# EAGLE board bt - Copy (2) (EAGLE 6.4)
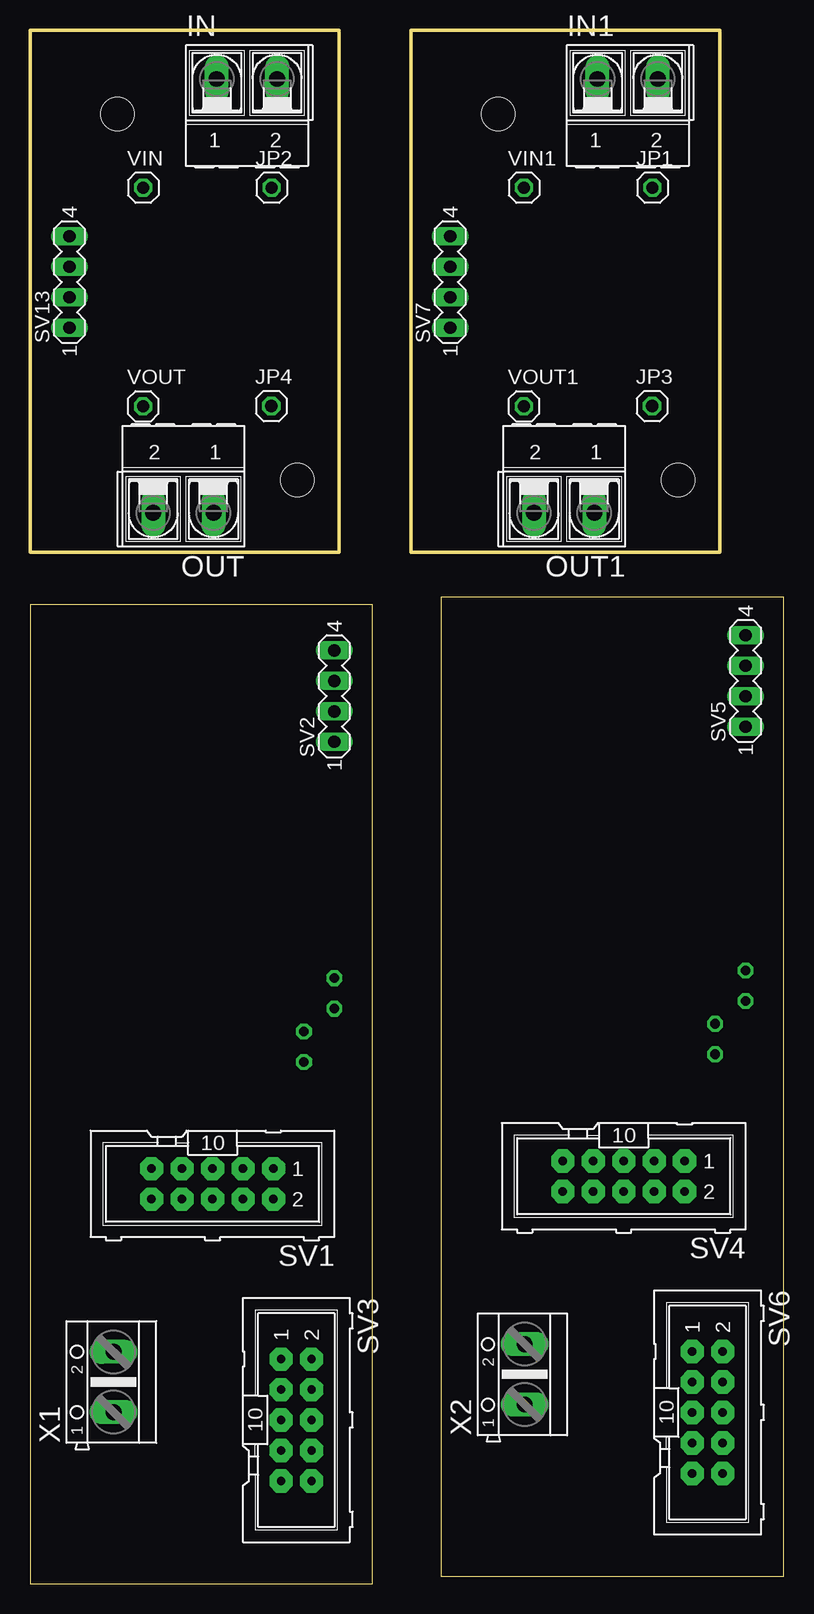
[diagram p0: board, top side]
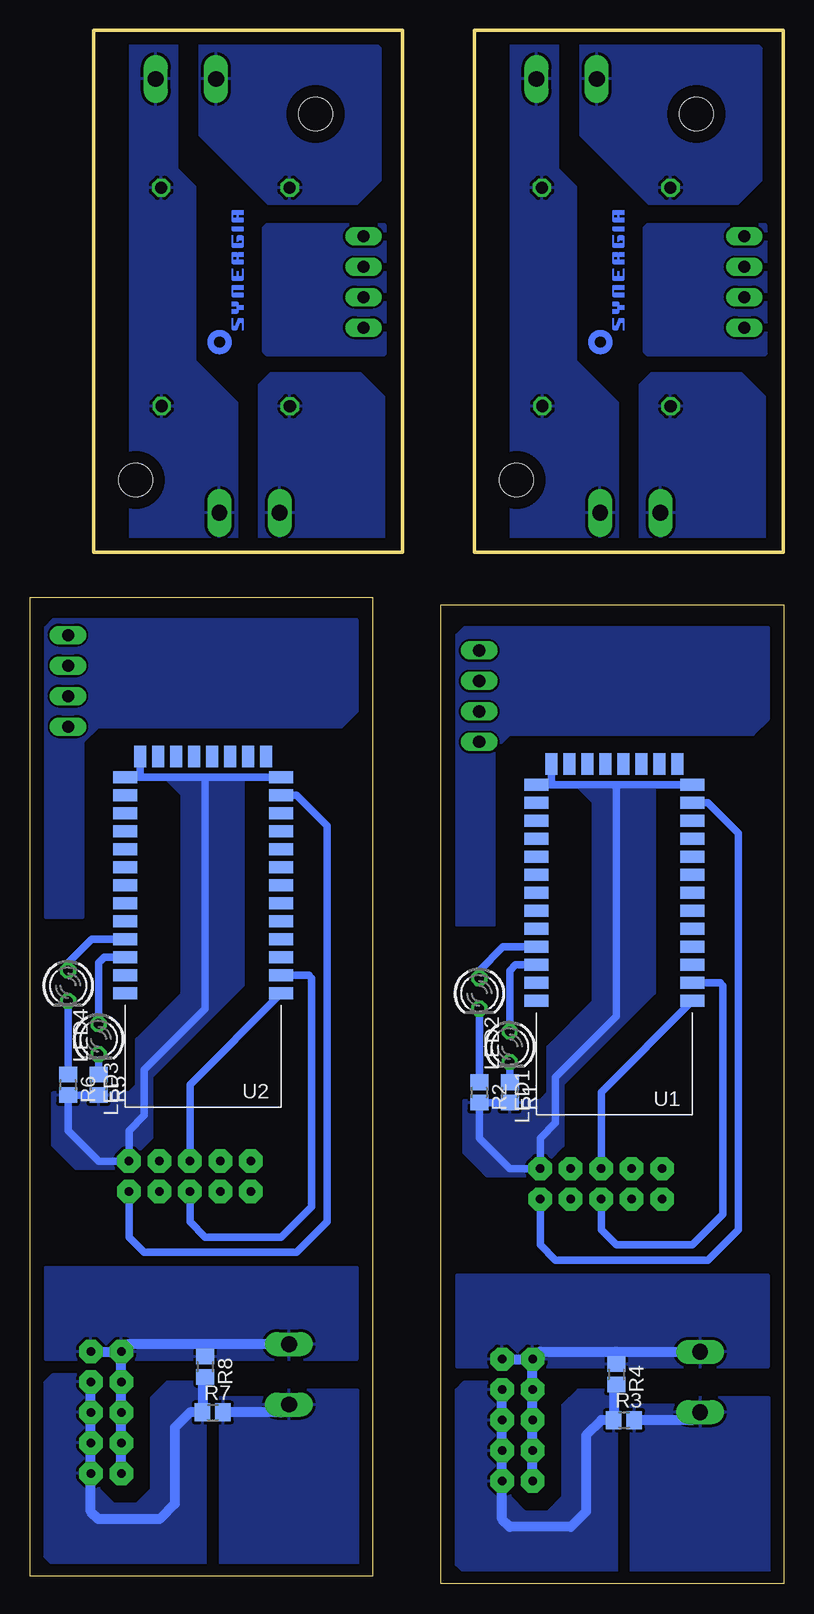
[diagram p1: board, bottom side, seen from below]

Size 62.84 x 129.48 mm. Coordinates in mm from the lower left corner, seen from the top.
Outline: 28.55,81.59 0,81.59 0,0 28.55,0 28.55,81.59
Outline: 62.84,82.22 34.29,82.22 34.29,0.64 62.84,0.64 62.84,82.22
Outline: 0.04,85.98 25.79,85.98 25.79,129.48 0.04,129.48 0.04,85.98
Outline: 31.79,85.98 57.54,85.98 57.54,129.48 31.79,129.48 31.79,85.98
Copper layers (1*16): Top 0.035mm / dielectric 1.5mm / Bottom 0.035mm
Design rules "default": minimum track width 10mil, minimum drill 24mil, track to track 8mil, track to pad 8mil, pad to pad 8mil, via to via 8mil, smd to smd 8mil, copper to edge 40mil, drill to drill 8mil, minimum pad ring 10mil, minimum via ring 8mil, stop-mask expansion 4mil, vias tented up to drill 0mil, thermal gap 10mil
Holes 2.8 mm at 22.29,91.98 7.29,122.48 54.04,91.98 39.04,122.48

## Footprints (pad centres in the part's own frame; a part is rotated, then mirrored left to right if it is on the bottom)
AK500/2-H = drill 1.321 long: 1 -2.515,0; 2 2.515,0
1X01 = drill 1.016 octagon: 1 0,0
LED3MM = drill 0.813 octagon: A -1.27,0; K 1.27,0
R0805 = smd 1.3 x 1.5: 1 -0.85,0; 2 0.85,0
ML10 = drill 0.7 pad 1.93 octagon: 1 -5.08,-1.27; 2 -5.08,1.27; 3 -2.54,-1.27; 4 -2.54,1.27; 5 0,-1.27; 6 0,1.27; 7 2.54,-1.27; 8 2.54,1.27; 9 5.08,-1.27; 10 5.08,1.27
MA04-1 = drill 1.016 long: 1 -3.81,0; 2 -1.27,0; 3 1.27,0; 4 3.81,0
BLUETOOTH_SMD = smd 2 x 1: 1 0,0; 2 0,-1.5; 3 0,-3; 4 0,-4.5; 5 0,-6; 6 0,-7.5; 7 0,-9; 8 0,-10.5; 9 0,-12; 10 0,-13.5; 11 0,-15; 12 0,-16.5; 13 0,-18; 22 13,-18; 23 13,-16.5; 24 13,-15; 25 13,-13.5; 26 13,-12; 27 13,-10.5; 28 13,-9; 29 13,-7.5; 30 13,-6; 31 13,-4.5; 32 13,-3; 33 13,-1.5; 34 13,0 | smd 1 x 1.8: 14 1.25,-19.75; 15 2.75,-19.75; 16 4.25,-19.75; 17 5.75,-19.75; 18 7.25,-19.75; 19 8.75,-19.75; 20 10.25,-19.75; 21 11.75,-19.75
AK500/2 = drill 1.321 long: 1 -2.515,0; 2 2.515,0

## Placement (x,y rotation side)
IN  [AK500/2-H]  18.09,125.4 0 top
IN1  [AK500/2-H]  49.84,125.4 0 top
JP1  [1X01]  51.9,116.34 0 top
JP2  [1X01]  20.15,116.34 0 top
JP3  [1X01]  51.87,98.14 0 top
JP4  [1X01]  20.12,98.14 0 top
LED1  [LED3MM]  22.84,44.76 270 bottom
LED2  [LED3MM]  25.38,49.2 270 bottom
LED3  [LED3MM]  57.13,45.39 270 bottom
LED4  [LED3MM]  59.67,49.84 270 bottom
OUT  [AK500/2-H]  12.79,89.24 180 top
OUT1  [AK500/2-H]  44.54,89.24 180 top
R1  [R0805]  22.84,40.95 270 bottom
R2  [R0805]  25.38,40.95 270 bottom
R3  18k  [R0805]  13.32,13.64 0 bottom
R4  10k  [R0805]  13.95,17.45 270 bottom
R5  [R0805]  57.13,41.58 270 bottom
R6  [R0805]  59.67,41.58 270 bottom
R7  18k  [R0805]  47.6,14.28 0 bottom
R8  10k  [R0805]  48.24,18.09 270 bottom
SV1  [ML10]  15.22,33.33 180 top
SV2  [MA04-1]  25.38,73.97 90 top
SV3  [ML10]  22.21,13.64 270 top
SV4  [ML10]  49.51,33.96 180 top
SV5  [MA04-1]  59.67,75.23 90 top
SV6  [ML10]  56.49,14.28 270 top
SV7  [MA04-1]  35.04,108.48 90 top
SV13  [MA04-1]  3.29,108.48 90 top
U1  HC_05  [BLUETOOTH_SMD]  7.6,48.57 180 bottom
U2  HC_05  [BLUETOOTH_SMD]  41.89,49.2 180 bottom
U$1  [SYNERGIA_12MM]  13.29,102.48 90 bottom
U$2  [SYNERGIA_12MM]  45.04,102.48 90 bottom
VIN  [1X01]  9.44,116.34 0 top
VIN1  [1X01]  41.19,116.34 0 top
VOUT  [1X01]  9.43,98.12 0 top
VOUT1  [1X01]  41.18,98.12 0 top
X1  [AK500/2]  6.97,16.82 90 top
X2  [AK500/2]  41.25,17.45 90 top

## Library data of the parts
IN IN1 OUT OUT1 X1 X2 = con-ptr500; OC_FARNELL: unknown; OC_NEWARK: unknown
JP1-JP4 VIN VIN1 VOUT VOUT1 = pinhead
LED1-LED4 = led
R1-R8 = resistor
SV1 SV3 SV4 SV6 = con-harting-ml; OC_FARNELL: unknown; OC_NEWARK: unknown
SV2 SV5 SV7 SV13 = con-lstb; OC_FARNELL: unknown; OC_NEWARK: unknown
U1 U2 = SerialPortBluetooth
U$1 U$2 = synergia_logo

## Nets
+3V1: SV4.2 U2.12
+3V3: SV1.2 U1.12
GND: R1.2 R2.2 SV1.1 U1.13 U1.21 U1.22
GND1: R5.2 R6.2 SV4.1 U2.13 U2.21 U2.22
GND2: IN1.2 JP1.1 JP3.1 OUT1.1
GND4: IN.2 JP2.1 JP4.1 OUT.1
N$1: SV1.5 U1.1
N$2: SV1.6 U1.2
N$3: LED1.K R1.1
N$4: LED2.K R2.1
N$5: LED2.A U1.31
N$6: LED1.A U1.32
N$8: SV4.5 U2.1
N$9: R3.1 R4.2 SV3.4 SV3.6 SV3.8 SV3.10
N$10: SV4.6 U2.2
N$11: LED4.A U2.31
N$12: LED3.A U2.32
N$13: LED3.K R5.1
N$14: LED4.K R6.1
N$15: R7.1 R8.2 SV6.4 SV6.6 SV6.8 SV6.10
N$17: OUT1.2 VOUT1.1
N$18: IN1.1 VIN1.1
N$33: OUT.2 VOUT.1
N$34: IN.1 VIN.1
V+: R3.2 X1.1
V+1: R7.2 X2.1
V-: R4.1 SV3.1 SV3.2 SV3.3 SV3.5 SV3.7 SV3.9 X1.2
V-1: R8.1 SV6.1 SV6.2 SV6.3 SV6.5 SV6.7 SV6.9 X2.2

## Tracks (layer width: path | path; a pad name or v marks a point on that pad's centre or on a via)
+3V1
  Bottom 0.61: SV4.2 54.59,28.88 53.32,27.61 40.62,27.61 38.08,30.15 38.08,63.17 40.61,65.7 U2.12
+3V3
  Bottom 0.61: SV1.2 20.3,28.25 19.03,26.98 6.33,26.98 3.79,29.52 3.79,62.54 6.32,65.06 U1.12
GND
  Bottom 0.61: U1.22 19.35,66.56 | U1.21 19.35,66.56 | 19.35,66.56 U1.13 13.95,66.56 13.95,47.3 19.03,42.22 19.03,38.41 20.3,37.14 SV1.1 22.84,34.59 25.38,37.14 R2.2 R1.2
  pour Bottom: 20.3,33.96 24.75,33.96 26.65,35.87 26.65,40.31 20.3,40.31 19.66,40.95 19.66,44.76 15.86,48.57 15.86,65.08 17.12,66.34 10.78,66.34 10.78,49.2 18.39,41.58 18.39,36.5 19.66,35.23 19.66,34.59
GND1
  Bottom 0.61: U2.22 53.64,67.2 | U2.21 53.64,67.2 | 53.64,67.2 U2.13 48.24,67.2 48.24,47.93 53.32,42.85 53.32,39.04 54.59,37.77 SV4.1 57.13,35.23 59.67,37.77 R6.2 R5.2
  pour Bottom: 54.59,34.59 59.03,34.59 60.94,36.5 60.94,40.95 54.59,40.95 53.95,41.58 53.95,45.39 50.14,49.2 50.14,65.71 51.41,66.98 45.06,66.98 45.06,49.84 52.68,42.22 52.68,37.14 53.95,35.87 53.95,35.23
GND2
  pour Bottom: 50.54,128.98 50.54,117.98 49.04,116.48 49.04,101.98 45.54,98.48 45.54,86.98 54.54,86.98 54.54,128.98
GND4
  pour Bottom: 18.79,128.98 18.79,117.98 17.29,116.48 17.29,101.98 13.79,98.48 13.79,86.98 22.79,86.98 22.79,128.98
N$1
  Bottom 0.61: U1.1 15.22,40.95 SV1.5
N$2
  Bottom 0.61: U1.2 5.29,50.07 5.06,49.84 5.06,30.79 7.6,28.25 13.95,28.25 15.22,29.52 SV1.6
N$3
  Bottom 0.61: R1.1 LED1.K
N$4
  Bottom 0.61: LED2.K R2.1
N$5
  Bottom 0.61: LED2.A 25.38,51.11 23.42,53.07 U1.31
N$6
  Bottom 0.61: LED1.A 22.84,51.11 22.38,51.57 U1.32
N$7
  pour Bottom: 24.11,54.91 24.11,69.52 22.84,70.79 2.52,70.79 1.25,72.06 1.25,79.68 26.65,79.68 27.29,79.05 27.29,54.91
N$8
  Bottom 0.61: U2.1 49.51,41.58 SV4.5
N$9
  Bottom 0.813: SV3.4 SV3.6 SV3.8 SV3.10 23.48,5.38 22.84,4.75 17.76,4.75 16.49,6.02 16.49,12.37 15.22,13.64 R3.1 14.17,16.39 R4.2
  pour Bottom: 13.95,13.01 13.95,0.94 26.65,0.94 27.29,1.57 27.29,16.18 26.65,16.82 23.48,16.82 22.84,16.18 22.84,7.29 21.57,6.02 19.66,6.02 18.39,7.29 18.39,14.91 17.12,16.18 13.95,16.18
N$10
  Bottom 0.61: U2.2 39.58,50.7 39.35,50.47 39.35,31.42 41.89,28.88 48.24,28.88 49.51,30.15 SV4.6
N$11
  Bottom 0.61: LED4.A 59.67,51.74 57.71,53.7 U2.31
N$12
  Bottom 0.61: LED3.A 57.13,51.74 56.67,52.2 U2.32
N$13
  Bottom 0.61: R5.1 LED3.K
N$14
  Bottom 0.61: LED4.K R6.1
N$15
  Bottom 0.813: SV6.4 SV6.6 SV6.8 SV6.10 57.76,6.02 57.13,5.38 52.05,5.38 50.78,6.66 50.78,13.01 49.51,14.28 R7.1 48.45,17.02 R8.2
  pour Bottom: 48.24,13.64 48.24,1.57 60.94,1.57 61.57,2.21 61.57,16.82 60.94,17.45 57.76,17.45 57.13,16.82 57.13,7.93 55.86,6.66 53.95,6.66 52.68,7.93 52.68,15.54 51.41,16.82 48.24,16.82
N$16
  pour Bottom: 58.4,55.55 58.4,70.16 57.13,71.42 36.81,71.42 35.54,72.7 35.54,80.31 60.94,80.31 61.57,79.68 61.57,55.55
N$17
  pour Bottom: 43.79,86.98 43.79,99.98 42.79,100.98 35.29,100.98 33.29,98.98 33.29,86.98
N$18
  pour Bottom: 48.79,128.98 48.79,120.73 43.04,114.98 35.54,114.98 33.54,116.98 33.54,127.98 34.54,128.98
N$19
  pour Bottom: 43.04,113.23 33.34,113.23 33.34,102.48 43.04,102.48 43.29,102.73 43.29,112.98
N$33
  pour Bottom: 12.04,86.98 12.04,99.98 11.04,100.98 3.54,100.98 1.54,98.98 1.54,86.98
N$34
  pour Bottom: 17.04,128.98 17.04,120.73 11.29,114.98 3.79,114.98 1.79,116.98 1.79,127.98 2.79,128.98
N$35
  pour Bottom: 11.29,113.23 1.59,113.23 1.59,102.48 11.29,102.48 11.54,102.73 11.54,112.98
V+
  Bottom 0.813: X1.1 7.62,13.64 R3.2
  pour Bottom: 12.68,14.91 8.87,14.91 8.24,15.54 1.25,15.54 1.25,0.94 12.68,0.94
V+1
  Bottom 0.813: X2.1 41.91,14.28 R7.2
  pour Bottom: 46.97,15.54 43.16,15.54 42.52,16.18 35.54,16.18 35.54,1.57 46.97,1.57
V-
  Bottom 0.813: SV3.2 SV3.1 | SV3.9 SV3.7 SV3.5 SV3.3 SV3.1 | X1.2 6.97,19.36 13.95,19.36 | SV3.1 20.3,19.36 13.95,19.36 | R4.1 13.95,19.36
  pour Bottom: 27.29,18.09 1.25,18.09 1.25,25.71 27.29,25.71
V-1
  Bottom 0.813: SV6.2 SV6.1 | SV6.9 SV6.7 SV6.5 SV6.3 SV6.1 | X2.2 41.25,19.99 48.24,19.99 | SV6.1 54.59,19.99 48.24,19.99 | R8.1 48.24,19.99
  pour Bottom: 61.57,18.72 35.54,18.72 35.54,26.34 61.57,26.34